# Altium PCB K.Ambrozinski_PCB1.PcbDoc
Units mm, origin at the board's own origin, x right, y up, seen from the top; angles counter-clockwise.
Board outline 59.05 x 33.83 mm, 2 copper layers (Top Layer, Bottom Layer), stack 1.569 mm thick; 66 components, 50 nets, 247 pads, 70 vias.
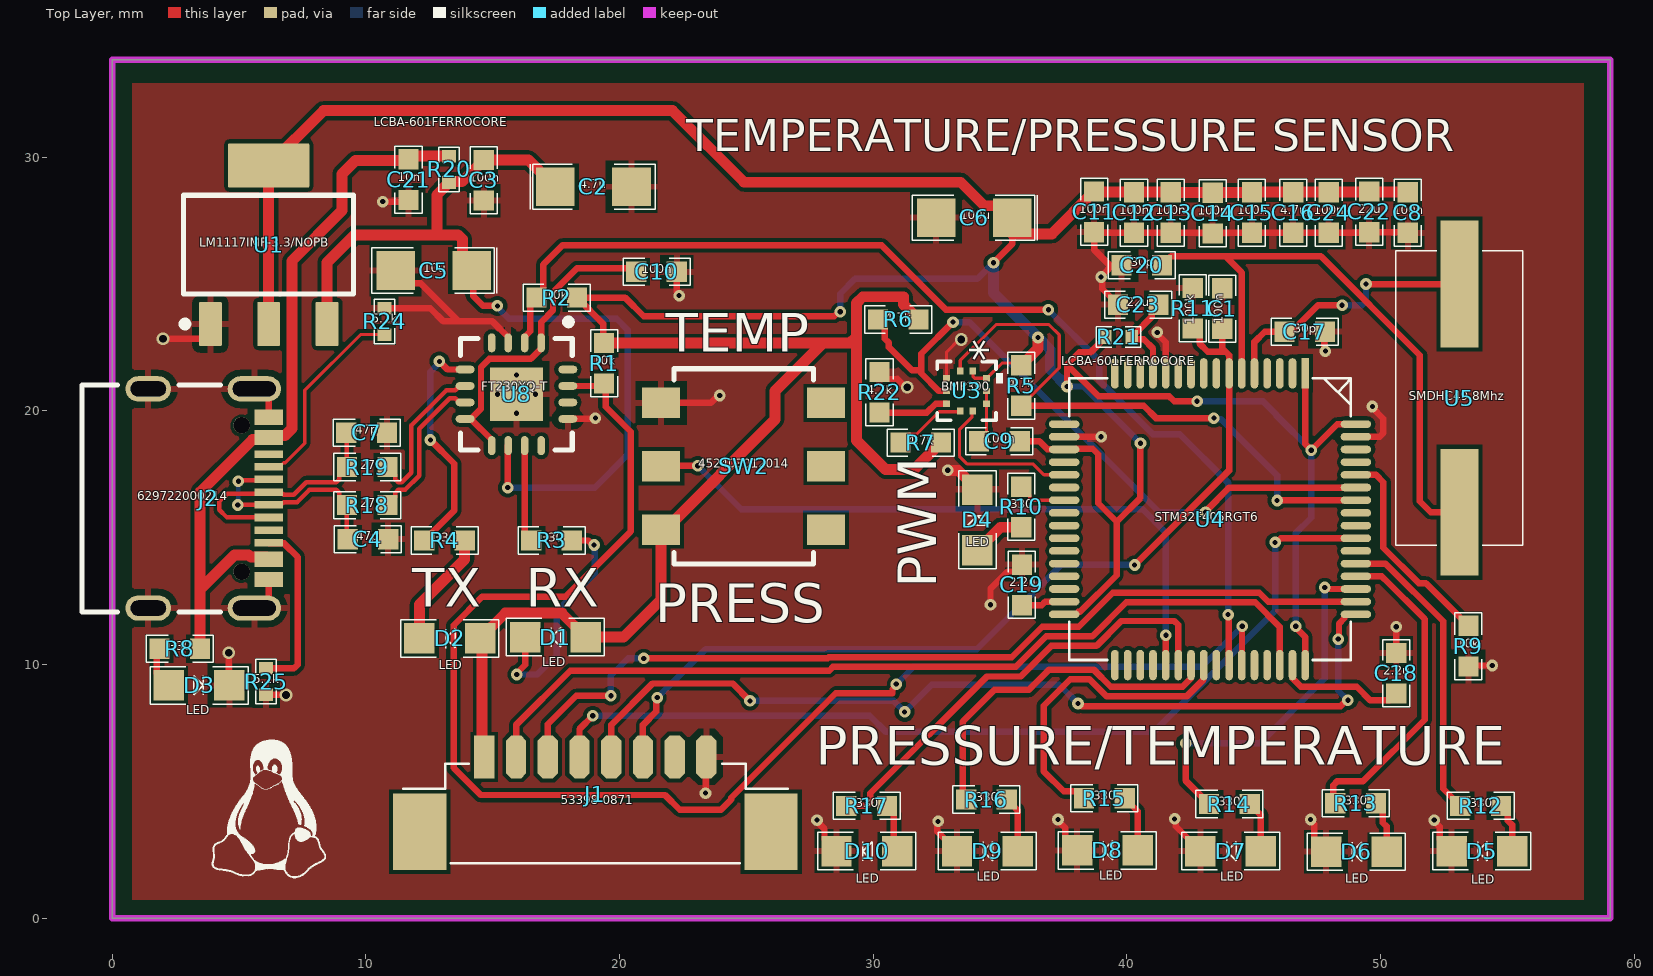
[diagram p0: Top Layer view]
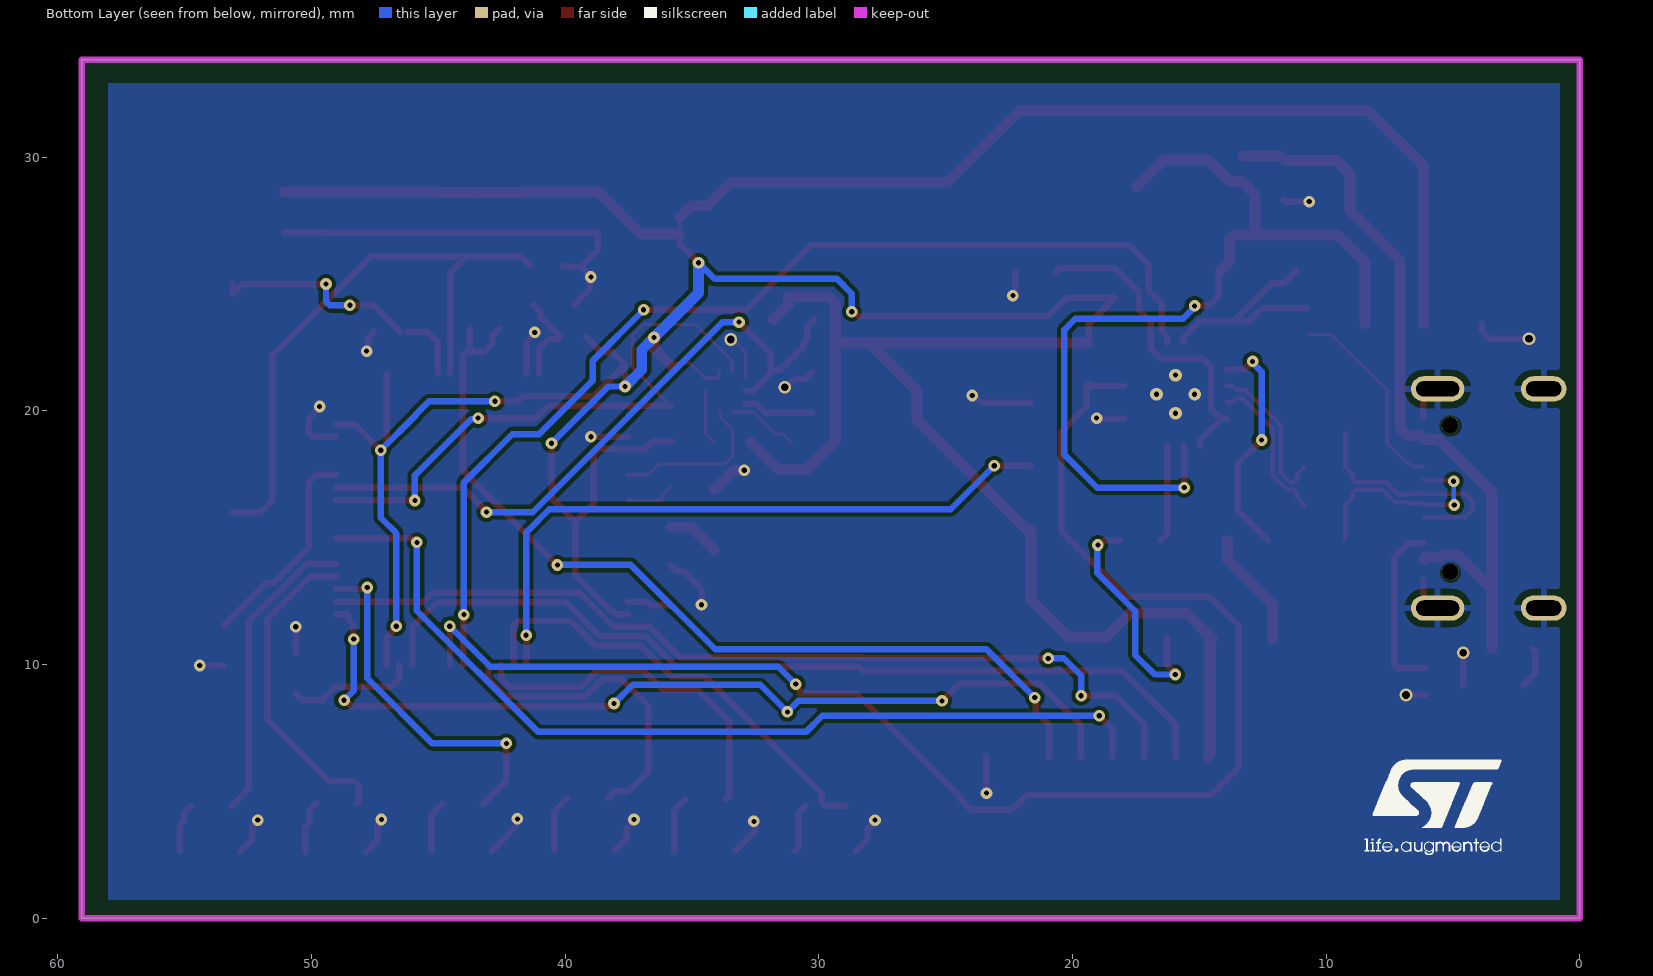
[diagram p1: Bottom Layer view, seen from below]

## Layer stack, top to bottom
Top Solder: solder mask 0.0254, SM-001, Dk 4
Top Layer: signal copper 0.035
Dielectric 1: core 1.4986, Core-043, Dk 4.3
Bottom Layer: signal copper 0.035
Bottom Solder: solder mask 0.0254, SM-001, Dk 4

## Board outline
0,0 0,33.833 59.055,33.833 59.055,0

## Design rules (kind name [scope] priority, off if disabled: settings)
Clearance [All vs InPoly] p1: gap=0.152 ignorepadtopadclearanceinfootprint=FALSE except(0: Arc-Hole Track-Hole SMDPad-Hole THPad-Hole Via-Hole Fill-Hole Poly-Hole Region-Hole Text-Hole)
Clearance Clearance_1 [All] p2: gap=0.127 ignorepadtopadclearanceinfootprint=FALSE except(0: Arc-Hole Track-Hole SMDPad-Hole THPad-Hole Via-Hole Fill-Hole Poly-Hole Region-Hole Text-Hole)
DiffPairsRouting [All] p1: maxlimit=0.254 minlimit=0.127 mostfreqgap=0.127 toplayer_minwidth=0.102 toplayer_maxwidth=0.381 toplayer_prefwidth=0.127 bottomlayer_minwidth=0.102 bottomlayer_maxwidth=0.381 bottomlayer_prefwidth=0.127 maxuncoupledlength=12.7
MinimumSolderMaskSliver SilkscreenOverComponentPads [All] p2: minsoldermaskwidth=0.254
PolygonConnect PolygonConnect_1 [isvia] p1: connectstyle=Direct reliefconductorwidth=0.254 reliefentries=4 polygonreliefangle="90 Angle" airgapwidth=0.254
PolygonConnect [All] p2: connectstyle=Relief reliefconductorwidth=0.254 reliefentries=4 polygonreliefangle="90 Angle" airgapwidth=0.254
RoutingVias [All] p1: holewidth=0.203 width=0.457 viastyle="Through Hole" minholewidth=0.203 minwidth=0.457 maxholewidth=5.08 maxwidth=12.7
SolderMaskExpansion [All] p1: expansion=0.102 istentingtop=FALSE
SupplyNets "Schematic Supply Nets_4" [InNet('GND')] p1: voltage=0.000
SupplyNets "Schematic Supply Nets_3" [InNet('VCCIO')] p2: voltage=0.000
SupplyNets "Schematic Supply Nets_2" [InNet('3V3')] p3: voltage=0.000
SupplyNets "Schematic Supply Nets_1" [InNet('5V')] p4: voltage=0.000
SupplyNets "Schematic Supply Nets" [InNet('3V3A')] p5: voltage=0.000
Width [All] p1: maxlimit=2.54 minlimit=0.102 preferedwidth=0.127 minimp=50.000000 maximp=50.000000 favimp=50.000000
29 further rules are at their usual default settings.

## Classes and differential pairs
differential pair class 90ohm: USB
component class part_2: C1 C11 C12 C13 C14 C15 C16 C17 C18 C19 C20 C24 D4 D5 D6 D7 D8 D9 D10 J1 R9 R10 R11 R12 R13 R14 R15 R16 R17 SW2 U4 U5
component class part_1: C2 C3 C4 C5 C6 C7 C8 C9 C10 C21 C22 C23 D1 D2 D3 J2 R1 R2 R3 R4 R5 R6 R7 R8 R18 R19 R20 R21 R22 R24 R25 U1 U3 U8
differential pair AA: +AA_P -AA_N
differential pair USB: +USB_P -USB_N

## Components (designator, comment, footprint, x,y, rotation, side; value= is the part's Value field where it differs from the comment)
C1 "100n" 0603 43.764,24.028 r270 top
C2 "4.7u" TANT_A 18.974,28.829 r0 top
C3 "100n" 0603 14.656,29.083 r90 top
C4 "47p" 0603 10.084,14.935 r180 top
C5 "10u" TANT_A 12.675,25.527 r180 top
C6 "100u" TANT_A 33.985,27.61 r180 top
C7 "47p" 0603 10.033,19.126 r180 top
C8 "100n" 0603 51.079,27.813 r90 top
C9 "100n" 0603 34.976,18.796 r0 top
C10 "100n" 0603 21.463,25.476 r180 top
C11 "100n" 0603 38.71,27.838 r90 top
C12 "100n" 0603 40.284,27.813 r90 top
C13 "100n" 0603 41.732,27.813 r90 top
C14 "100n" 0603 43.383,27.788 r90 top
C15 "100n" 0603 44.933,27.813 r90 top
C16 "4.7u" 0603 46.558,27.813 r90 top
C17 "30p" 0603 47.015,23.114 r0 top
C18 "2.2u" 0603 50.622,9.652 r270 top
C19 "2.2u" 0603 35.865,13.132 r270 top
C20 "30p" 0603 40.589,25.73 r180 top
C21 "10n" 0603 11.684,29.108 r90 top
C22 "22u" 0603 49.555,27.838 r90 top
C23 "22u" 0603 40.449,24.181 r0 top
C24 "100n" 0603 47.955,27.813 r90 top
D1 "LED" Dioda_0805 17.475,11.074 r0 top
D2 "LED" Dioda_0805 13.31,11.024 r0 top
D3 "LED" Dioda_0805 3.429,9.169 r180 top
D4 "LED" Dioda_0805 34.112,15.697 r270 top
D5 "LED" Dioda_0805 54,2.642 r0 top
D6 "LED" Dioda_0805 49.047,2.616 r0 top
D7 "LED" Dioda_0805 44.094,2.642 r0 top
D8 "LED" Dioda_0805 39.235,2.667 r0 top
D9 "LED" Dioda_0805 34.5,2.638 r0 top
D10 "LED" Dioda_0805 29.75,2.638 r0 top
J1 "53398-0871" 53398-0871 19.05,4.877 r0 top
J2 "629722000214" 629722000214 2.57,16.541 r270 top
R1 "10k" 0603 19.392,21.869 r90 top
R2 "10k" 0603 17.526,24.46 r0 top
R3 "330" 0603 17.323,14.884 r0 top
R4 "330" 0603 13.106,14.884 r0 top
R5 "4.7k" 0603 35.839,20.993 r90 top
R6 "4.7k" 0603 30.988,23.597 r0 top
R7 "4.7k" 0603 31.877,18.745 r0 top
R8 "330" 0603 2.667,10.617 r180 top
R9 "10k" 0603 53.467,10.719 r90 top
R10 "330" 0603 35.839,16.205 r270 top
R11 "100k" 0603 42.596,24.041 r270 top
R12 "330" 0603 53.95,4.42 r180 top
R13 "330" 0603 49.022,4.521 r180 top
R14 "330" 0603 44.044,4.496 r180 top
R15 "330" 0603 39.116,4.724 r180 top
R16 "330" 0603 34.468,4.674 r180 top
R17 "330" 0603 29.743,4.42 r180 top
R18 "27" 0603 10.058,16.281 r180 top
R19 "27" 0603 10.058,17.78 r180 top
R20 "LCBA-601FERROCORE" 0402 13.284,29.515 r270 top
R21 "LCBA-601FERROCORE" 0402 39.675,22.911 r0 top
R22 "4.7k" 0603 30.251,20.726 r270 top
R24 "5.1k" 0402 10.744,23.52 r90 top
R25 "5.1k" 0402 6.071,9.322 r270 top
SW2 "452403012014" 452403012014 24.892,17.805 r90 top
U1 "LM1117IMP-3.3/NOPB" DCY0004A_N 6.172,26.543 r90 top
U3 "BMP390" 10LGA_2X2X0p75_BOS 33.68,20.777 r270 top
U4 "STM32F405RGT6" "LQFP 64 0.5" 43.282,15.723 r180 top
U5 "SMDHC49 8Mhz" SMDHC_49 53.111,20.498 r90 top
U8 "FT230XQ-T" QFN-16_N 15.938,20.65 r270 top

## Footprints (in the part's own frame and the unit in brackets; to place one, negate y for a bottom-side part, rotate by r counter-clockwise, add the part's x,y. Pads: shape width x height; smd on the part's side, far side on the other; paste and mask are expansions set on the pad)
10LGA_2X2X0p75_BOS [mil]
  rect 11x10 smd paste+0 mask+0: 1(-31,9.84) 2(-31,-9.84) 6(31,-9.84) 7(31,9.84)
  rect 10x11 smd paste+0 mask+0: 3(-19.68,-31) 4(0,-31) 5(19.68,-31) 8(19.68,31) 9(0,31) 10(-19.68,31)
  silkscreen extent -46,-46 46,56, body extent -41,-41 41,41, height 32
0402 [mm]
  rect 0.5x0.55 smd: 1(-0.521,0) 2(0.521,0)
  silkscreen extent -0.88,-0.41 0.88,0.41, body extent -0.67,-0.28 0.63,0.28, height 0.5
0603 [mm]
  rect 0.8x0.8 smd: 1(-0.8,0) 2(0.8,0)
  silkscreen extent -1.32,-0.53 1.32,0.53, body extent -1.09,-0.4 1.14,0.4, height 0.6
53398-0871 [mm] "Molex PicoBlade 8pin pionowy SMD"
  rect 2.1x3 smd: 0(-6.925,-1.475) 0(6.925,-1.475)
  rect 0.8x1.7 smd: 1(-4.375,1.475)
  oct 0.8x1.7 smd: 2(-3.125,1.475) 3(-1.875,1.475) 4(-0.625,1.475) 5(0.625,1.475) 6(1.875,1.475) 7(3.125,1.475) 8(4.375,1.475)
  silkscreen extent -7.57,-2.72 7.58,1.2, body extent -7.57,-2.57 7.57,1.62, height 4.7
452403012014 [mm] "SMT Mini Slide Switch, Same Side Connection"
  rect 1.2x1.5 smd: 1(-2.5,3.25) 2(0,3.25) 3(2.5,3.25) 4(-2.5,-3.25) 5(0,-3.25) 6(2.5,-3.25)
  silkscreen extent -3.85,-2.75 3.85,2.75, body extent -3.85,-3.75 3.85,3.75, height 3.48
629722000214 [mm] "USB TYPE C VERTICAL PLUG"
  rect 0.6x1.14 smd: A1/B12(-3.2,3.605) A4/B9(-2.4,3.605) A9/B4(2.4,3.605) A12/B1(3.2,3.605)
  rect 0.3x1.14 smd: A5(-1.25,3.605) A6(-0.25,3.605) A7(0.25,3.605) A8(1.25,3.605) B5(1.75,3.605) B6(0.75,3.605) B7(-0.75,3.605) B8(-1.75,3.605)
  round 0.65 hole 0.65 unplated: MH1(-2.89,2.535) MH2(2.89,2.535)
  oval 1x2.1 hole 0.6 slot 1.7 at 90 deg: Shell(-4.32,3.035) Shell(4.32,3.035)
  oval 1x1.8 hole 0.6 slot 1.4 at 90 deg: Shell(-4.32,-1.145) Shell(4.32,-1.145)
  silkscreen extent -4.47,-3.76 4.47,1.7, body extent -4.79,-3.76 4.79,3.95, height 3.33
DCY0004A_N [mm] "SOT223, 4-Leads, Body 6.7x3.7mm, Pitch 2.3mm, IPC Medium Density"
  rrect11% 1.75x0.9 smd: 1(-3.125,2.3) 2(-3.125,0) 3(-3.125,-2.3)
  rrect6% 1.75x3.2 smd: 4(3.125,0)
  silkscreen extent -3.25,-3.35 1.95,3.42, body extent -3.5,-3.25 3.5,3.25, height 1.62
Dioda_0805 [mm]
  rect 1.2x1.2 smd: 1(-1.194,0) 2(1.194,0)
  silkscreen extent -1.93,-0.74 1.93,0.74, body extent -1.44,-0.6 1.53,0.6, height 0.6
"LQFP 64 0.5" [mm] "Low-profile Quad Flat Package, 64 leads, 0.5 mm"
  rect 0.3x1.2 smd: 1(-3.75,-5.75)
  oval 0.3x1.2 smd: 2(-3.25,-5.75) 3(-2.75,-5.75) 4(-2.25,-5.75) 5(-1.75,-5.75) 6(-1.25,-5.75) 7(-0.75,-5.75) 8(-0.25,-5.75) 9(0.25,-5.75) 10(0.75,-5.75) 11(1.25,-5.75) 12(1.75,-5.75) 13(2.25,-5.75) 14(2.75,-5.75) 15(3.25,-5.75) 16(3.75,-5.75) 33(3.75,5.75) 34(3.25,5.75) 35(2.75,5.75) 36(2.25,5.75) 37(1.75,5.75) 38(1.25,5.75) 39(0.75,5.75) 40(0.25,5.75) 41(-0.25,5.75) 42(-0.75,5.75) 43(-1.25,5.75) 44(-1.75,5.75) 45(-2.25,5.75) 46(-2.75,5.75) 47(-3.25,5.75) 48(-3.75,5.75)
  oval 1.2x0.3 smd: 17(5.75,-3.75) 18(5.75,-3.25) 19(5.75,-2.75) 20(5.75,-2.25) 21(5.75,-1.75) 22(5.75,-1.25) 23(5.75,-0.75) 24(5.75,-0.25) 25(5.75,0.25) 26(5.75,0.75) 27(5.75,1.25) 28(5.75,1.75) 29(5.75,2.25) 30(5.75,2.75) 31(5.75,3.25) 32(5.75,3.75) 49(-5.75,3.75) 50(-5.75,3.25) 51(-5.75,2.75) 52(-5.75,2.25) 53(-5.75,1.75) 54(-5.75,1.25) 55(-5.75,0.75) 56(-5.75,0.25) 57(-5.75,-0.25) 58(-5.75,-0.75) 59(-5.75,-1.25) 60(-5.75,-1.75) 61(-5.75,-2.25) 62(-5.75,-2.75) 63(-5.75,-3.25) 64(-5.75,-3.75)
  silkscreen extent -5.55,-5.55 5.55,5.55, body extent -6,-6 6,6, height 1.5
QFN-16_N [mm] "QFN, 16-Leads, Body 4x4mm, Pitch 0.65mm, Thermal Pad 2.1x2.1mm, IPC Medium Density"
  oval 0.75x0.3 smd: 1(-2.025,0.975) 2(-2.025,0.325) 3(-2.025,-0.325) 4(-2.025,-0.975) 9(2.025,-0.975) 10(2.025,-0.325) 11(2.025,0.325) 12(2.025,0.975)
  oval 0.3x0.75 smd: 5(-0.975,-2.025) 6(-0.325,-2.025) 7(0.325,-2.025) 8(0.975,-2.025) 13(0.975,2.025) 14(0.325,2.025) 15(-0.325,2.025) 16(-0.975,2.025)
  rect 2.1x2.1 smd paste-1.05: 17(0,0)
  silkscreen extent -2.97,-2.2 2.2,2.2, body extent -2.05,-2.05 2.05,2.05, height 0.8
SMDHC_49 [mm]
  rect 5x1.5 smd: 1(-4.5,0) 2(4.5,0)
  silkscreen extent -5.8,-2.5 5.8,2.5, body extent -5.8,-2.5 5.8,2.5, height 4.3
TANT_A [mil]
  rect 60x60 smd: 1(-59.06,0) 2(59.06,0)
  silkscreen extent -98,-35 96,35, body extent -67,-33 67,33, height 67

## Part data
C1 C11 C12 C13 C14 C15 C16 C17 C18 C19 C20 C22 C23 C24: library part CapN, "kondensator ceramiczny"
  C1 C11 C12 C13 C14 C15 C16 C17 C18 C19 C20 C24: V="10 V"
  C22 C23: V=10V
C2 C5 C6: library part CapP, "kondensator tantalowy", VOLTAGE="10 V"
C3 C4 C7 C8 C9 C10 C21: library part CapN, "kondensator ceramiczny", VOLTAGE="10 V"
  C3 C4 C7 C8 C9 C10: V="10 V"
  C21: Parameter 1=10V
D1 D2 D3 D4 D5 D6 D7 D8 D9 D10: library part Dioda_LED, "Dioda LED SMD"
J1: library part CON8, "Molex PicoBlade 8pin", Producent=Molex
J2: "WR-COM USB 2.0 Type C Receptacle Horizontal SMT", Manufacturer="Wurth Elektronik", Operating Temperature Max=85°C, Operating Temperature Min=-40°C, Rated Current=5A, Working Voltage="20V (DC)", Application="USB 2.0", Category="Input/Output Connectors", ComponentLink1Description="Website Link", ComponentLink1URL=https://www.we-online.com/redexpert/article/629722000214?ad, ComponentLink2Description="Datasheet Link", ComponentLink2URL=https://www.we-online.com/redexpert/spec/629722000214?ad, Gender=Receptacle, Interface Type="Type C", Manufacturer Part Number=629722000214, Match Code=WR-USB, Mount="Surface Mount", Number of Pins=16, Number of Ports=1, Orientation=Horizontal, Packaging="Tape and Reel"
R1 R2 R3 R4 R5 R6 R7 R8 R9 R10 R11 R12 R13 R14 R15 R16 R17 R18 R19 R20 R21 R22 R24 R25: library part Res, "Rezystor SMD"
SW2: "WS-SLSV SMT Mini Slide Switch, Same Side Connection, DPDT, 6VDC, 300mA, 350g", Manufacturer="Wurth Elektronik", Operating Temperature Max=85°C, Operating Temperature Min=-40°C, Rated Current=300mA, Rated voltage=6VDC, Category="Slide Switches", Circuit=DPDT, ComponentLink1Description="Website Link", ComponentLink1URL=https://www.we-online.com/redexpert/article/452403012014?ad, ComponentLink2Description="Datasheet Link", ComponentLink2URL=https://www.we-online.com/redexpert/spec/452403012014?ad, Contact Material="Copper Alloy", Contact Plating=Silver, Height=3.3mm, Length=7.7mm, Manufacturer Part Number=452403012014, Match Code=WS-SLSV, Mount="Surface Mount", Operation Force=350g, Packaging="Tape and Reel", Terminal Material="Copper Alloy", Terminal Plating=Silver, Width=5.5mm
U1: library part CMP-0062-01631-4, "800mA Low-Dropout Linear Regulator, 4-pin SOT-223, Pb-Free", Manufacturer="Texas Instruments", PackageTopMarking=XYTT*N05B, PowerWise=N, Code_IPC=SOT223-4, Code_JEDEC=TO-261-AA, ComponentLink1Description="Datasheet URL", ComponentLink1URL=http://www.ti.com/general/docs/lit/getliterature.tsp?genericPartNumber=LM1117-N&fileType=pdf, CompType="LDO IC", High-Reliability=Y, PackageDescription="Molded SOT-223, 6.50 x 3.56 x 1.6mm Body, 4 Lead, 2.3mm Pitch", PackageReference=DCY0004A, PartNumber=LM1117IMP-3.3/NOPB, PinCount=4, RoHS=Y
U3: "No Description Available", Mfr_Name="Bosch Sensortec", RefDes=RefDes, Type=Type
U4: library part STM32F415RGT6, "STM32F415, 64 leads, LQFP"
U5: library part kwarc, "rezonator kwarcowy"
U8: "USB to Basic UART Interface Chip, UHCI/OHCI/EHCI Compatible, USB 2.0 Compatible, -40 to +85 degC, 16-Pin QFN, Pb-Free, Tray", Manufacturer=FTDI, Code_JEDEC=MO-220WGGC, ComponentLink1Description="Manufacturer URL", ComponentLink1URL=http://www.ftdichip.com/, ComponentLink2Description=Datasheet, ComponentLink2URL=http://www.ftdichip.com/Support/Documents/DataSheets/ICs/DS_FT230X.pdf, ComponentLink3Description="FT230X Product Page", ComponentLink3URL=www.ftdichip.com/Products/ICs/FT230X.html, DatasheetVersion="ver 1.2, Feb-2013", PackageDescription="16-Pin Quad Flat No-Lead, 4x4 mm Body, 0.65 mm Pitch", PackageReference=QFN-16, PackageVersion=Feb-13, PartNumber=FT230XQ-T

## Via types
v1: diameter 0.457, hole 0.203, Top Layer to Bottom Layer, 61 vias
v2: diameter 0.5, hole 0.3, Top Layer to Bottom Layer, 5 vias
v3: diameter 0.5, hole 0.2, Top Layer to Bottom Layer, 4 vias

## Nets (pads, with @x,y where several pads share a name; then routed paths per layer and width w, separated by ;. In a path a pad name is that pad's centre, name@x,y a point inside that pad or via, vN(x,y) a via of type N, cw(c..) or ccw(c..) an arc to the next point about the centre after c; other vN are vias at no path point)
3V3: C6.1 C8.2 C9.2 C11.2 C12.2 C13.2 C14.2 C15.2 C16.2 C22.2 C24.2 D1.2 D2.2 J1.1 R1.2 R2.2 R5.2 R6.2 R7.2 R21.1 SW2.1 U1.2 U1.4 U3.1 U3.10 U4.1 U4.19 U4.32 U4.48 U4.64 | length 182.2
  Top Layer w0.127: U3.1 33.934,21.561 33.934,21.357 34.009,21.283 34.475,21.283 34.48,21.277 35.079,21.876 35.757,21.876 R5.2 ; C6.1@35.485,26.975 C6.1
  Top Layer w0.254: R1.2 19.355,22.707 19.355,23.431 R2.2 20.218,24.46 20.955,23.724 28.469,23.724 28.647,23.901 v1(28.702,23.901) ; v1(34.746,25.832) 35.485,26.571 C6.1@35.485,26.975 ; C9.2 36.557,18.796 36.871,18.481 37.523,18.481 U4.19 37.994,18.473 38.017,18.496 38.662,18.496 38.874,18.284 38.874,16.346 39.599,15.622 ; U4.32 37.994,11.973 38.09,12.069 38.149,12.069 39.599,13.518 39.599,15.622 ; v1(37.643,20.955) 37.643,21.547 37.655,21.56 37.655,21.831 38.121,22.297 38.565,22.297 39.154,22.886 R21.1 ; 37.655,21.806 38.887,20.574 41.667,20.574 41.87,20.371 v1(42.774,20.371) ; v1(40.538,18.72) 40.538,16.561 39.599,15.622 ; v1(46.66,11.506) 46.66,11.451 47.032,11.079 U4.48 ; U4.1 47.032,18.691 47.269,18.453 v1(47.269,18.44) 48.293,19.464 49.023,19.464 U4.64
  Top Layer w0.432: U1.2 U1.4 8.33,31.826 22.098,31.826 24.917,29.007 33.452,29.007 34.379,28.08 35.015,28.08 C6.1 ; J1.1 14.589,6.438 14.589,10.938 D2.2 15.497,12.017 17.726,12.017 D1.2 20.168,11.074 21.642,12.549 SW2.1 21.792,15.305 26.137,19.65 26.137,20.777 28.024,22.664 ; R1.2 19.397,22.664 28.024,22.664 ; 29.337,22.932 29.337,18.821 30.48,17.678 31.61,17.678 R7.2 ; R6.2 31.197,24.187 31.197,24.492 29.59,24.492 29.337,24.239 29.337,22.917 29.084,22.664 28.024,22.664 ; C6.1@35.485,26.975 37.046,26.975 C11.2 ; R5.2 36.495,22.449 36.495,22.881 v1(36.5,22.885) ; C11.2@38.71,28.613 C12.2 C13.2 41.745,28.6 43.37,28.6 C14.2 43.396,28.6 44.92,28.6 C15.2 C16.2 C24.2 47.968,28.626 49.543,28.626 C22.2 49.568,28.626 51.067,28.626 C8.2
  Bottom Layer w0.254: v1(28.702,23.901) 28.702,24.613 29.286,25.197 34.111,25.197 34.226,25.312 v1(34.746,25.832) ; v1(37.643,20.955) 38.303,20.955 v1(40.538,18.72) ; v1(42.774,20.371) 45.368,20.371 45.898,19.841 45.898,19.812 v1(47.269,18.44) 47.269,15.786 46.66,15.176 v1(46.66,11.506)
  Bottom Layer w0.432: v1(34.746,25.832) 34.746,24.639 v1(36.5,22.885) 36.982,22.403 36.982,21.615 v1@37.638,20.96
3V3A: C23.2 R21.2 U4.13 | length 3.7
  Top Layer w0.254: U4.13 41.032,22.454 40.663,22.822 40.284,22.822 R21.2 40.195,22.936 40.318,23.059 40.344,23.059 40.976,23.692 40.976,23.908 C23.2
5V: C2.1 C3.2 C5.1 R20.2 U1.3 U8.10 | length 36.5
  Top Layer w0.254: C5.1 14.228,25.474 14.228,24.533 14.63,24.13 v1(15.189,24.13) ; v1(15.596,16.967) 15.604,16.976 15.604,18.616 U8.10
  Top Layer w0.432: U1.3 8.472,25.846 9.552,26.925 12.802,26.925 ; C5.1 13.805,25.896 13.805,26.759 13.638,26.925 12.802,26.925 ; C2.1 16.42,29.883 C3.2 13.801,29.028 13.318,29.028 R20.2 13.259,28.994 13.225,28.96 13.225,28.935 12.802,28.511 12.802,26.925
  Bottom Layer w0.254: v1(15.189,24.13) 15.189,24.079 15.646,23.622 19.888,23.622 20.32,23.19 20.32,18.263 19.025,16.967 v1(15.596,16.967)
AA_N: R18.1 U8.7 | length 6.1
  Top Layer w0.178: R18.1 11.17,16.593 11.17,16.774 11.274,16.878 11.547,16.878 12.103,17.434 12.103,19.294 13.307,20.498 13.523,20.498 13.695,20.325 U8.7
AA_P: R19.1 U8.6 | length 6.1
  Top Layer w0.178: R19.1 11.17,17.469 11.17,17.287 11.274,17.183 11.421,17.183 11.798,17.56 11.798,19.42 13.181,20.803 13.523,20.803 13.695,20.975 U8.6
GND: C1.1 C2.2 C3.1 C4.1 C5.2 C6.2 C7.1 C8.1 C10.1 C11.1 C12.1 C13.1 C14.1 C15.1 C16.1 C17.2 C18.1 C19.1 C20.2 C21.1 C22.1 C23.1 C24.1 D3.1 D4.1 D5.1 D6.1 D7.1 D8.1 D9.1 D10.1 J1.8 J2.A1/B12 J2.A12/B1 J2.Shell R9.1 R11.1 R22.1 R24.2 R25.2 SW2.3 U1.1 U3.3 U4.12 U4.18 U4.63 U8.3 U8.13 U8.17 | length 64.6
  Top Layer w0.127: U3.3 32.893,22.301 33.401,22.809 v2(33.477,22.809)
  Top Layer w0.254: v2(2.007,22.835) 3.549,22.835 3.872,23.158 U1.1 ; v2(4.597,10.465) 4.597,9.195 D3.1 ; J2.Shell@5.605,12.221 5.831,12.221 6.175,12.566 J2.A12/B1 ; J2.Shell@5.605,20.861 5.831,20.861 6.175,20.516 J2.A1/B12 ; R25.2 6.077,8.795 6.852,8.795 v2@6.858,8.788 ; v1(10.668,28.245) 11.62,28.245 C21.1 ; R24.2 12.546,24.041 13.066,23.52 13.665,23.52 ; C5.2 11.685,25.017 12.169,25.017 13.665,23.52 ; U8.3 15.613,22.9 14.993,23.52 13.665,23.52 ; U8.13 17.972,19.684 19.024,19.684 v1(19.05,19.71) ; SW2.3 23.603,20.305 23.897,20.599 v1(23.952,20.599) ; C10.1 22.263,24.68 22.352,24.591 v1(22.352,24.536) ; v1(23.393,4.928) 23.409,4.943 23.409,6.336 J1.8 ; v1(27.788,3.861) 27.788,3.806 28.083,3.51 28.083,3.111 D10.1 ; R22.1 30.524,21.253 30.953,21.253 31.277,20.93 v2(31.344,20.93) ; v1(32.563,3.81) 32.563,3.755 32.52,3.712 32.52,3.424 D9.1 ; v1(34.626,12.352) 34.626,12.985 35.303,13.662 35.595,13.662 C19.1 ; v1(37.287,3.886) 37.287,3.831 37.568,3.55 37.568,3.14 D8.1 ; U4.18 v1(38.989,18.974) ; C23.1 39.028,24.802 39.028,25.234 v1(38.989,25.273) 38.989,25.298 39.376,25.686 ; C20.2@40.069,25.705 40.069,25.73 40.024,25.686 39.376,25.686 ; v1(41.199,23.089) 41.199,23.034 41.532,22.701 U4.12 ; v1(41.885,3.912) 41.923,3.873 41.923,3.619 D7.1 ; v1(47.244,3.886) 47.244,3.831 47.381,3.695 47.381,3.089 D6.1 ; C17.2@47.536,23.114 47.789,22.861 47.789,22.391 v1(47.828,22.352) ; U4.63 49.965,18.973 50.114,19.121 50.114,19.681 49.682,20.113 v1(49.682,20.168) ; C18.1 v1(50.622,11.481) ; C8.1 51.054,27.038 C22.1 49.53,27.013 C24.1 C16.1 C15.1 43.409,27.013 C14.1 43.358,27.013 C13.1 C12.1 38.735,27.013 C11.1 38.71,26.352 39.376,25.686 ; v1(52.121,3.861) 52.121,3.806 52.334,3.593 52.334,3.115 D5.1 ; R9.1 53.505,9.957 v1(54.407,9.957)
  Top Layer w0.432: v1(32.944,17.653) 32.949,17.648 33.355,17.648 D4.1
  other v2: 6.855,8.792
  other v3: 15.938,19.9 15.188,20.65 16.688,20.65 15.938,21.4
INT: U3.7 U4.21 | length 6.4
  Top Layer w0.127: U3.7 33.893,19.952 33.893,19.745 33.401,19.253 33.401,18.212 33.718,17.895 36.309,17.895 36.731,17.473 U4.21
MEAS1: R12.2 U4.53 | length 11.9
  Top Layer w0.254: U4.53 50.199,13.973 52.476,11.695 52.476,5.093 R12.2
MEAS2: R13.2 U4.52 | length 12.8
  Top Layer w0.254: R13.2 48.136,4.607 48.136,5.236 48.285,5.385 49.301,5.385 51.74,7.823 51.74,11.786 50.149,13.377 50.14,13.377 50.044,13.473 U4.52
MEAS3: R14.2 U4.51 | length 14.2
  Top Layer w0.254: v1(42.316,6.883) 42.316,5.423 R14.2 ; v1(47.803,13.03) 47.858,13.03 47.915,12.973 U4.51
  Bottom Layer w0.254: v1(42.316,6.883) 45.237,6.883 47.803,9.449 v1(47.803,13.03)
MEAS4: R15.2 U4.40 | length 12.5
  Top Layer w0.254: R15.2 38.043,4.997 37.509,4.997 36.729,5.778 36.729,8.371 37.772,9.414 38.53,9.414 39.206,8.738 42.357,8.738 43.023,9.404 43.023,9.964 U4.40
MEAS5: R16.2 U4.39 | length 13.9
  Top Layer w0.254: R16.2 33.528,4.813 33.528,7.747 34.773,8.992 36.138,8.992 36.941,9.795 38.688,9.795 39.364,9.119 42.199,9.119 42.523,9.442 42.523,9.964 U4.39
MEAS6: R17.2 U4.38 | length 18
  Top Layer w0.254: R17.2 29.741,4.42 29.889,4.568 29.889,4.925 34.487,9.522 35.82,9.522 37.024,10.726 38.802,10.726 39.786,11.711 41.874,11.711 42.023,11.562 42.023,9.981 U4.38
MEASUREMENT_MODE: SW2.2 U4.37 | length 26.2
  Top Layer w0.254: SW2.2 21.667,17.831 v1(23.089,17.831) ; U4.37 41.536,9.977 41.536,11.146 v1(41.54,11.151)
  Bottom Layer w0.254: v1(23.089,17.831) 24.801,16.118 40.624,16.118 41.54,15.201 v1(41.54,11.151)
NetC9_1: C9.1 U3.8 U3.9 | length 2.1
  Top Layer w0.127: C9.1 34.468,19.088 U3.8 U3.9
NetD1_1: D1.1 R3.2 | length 9.4
  Top Layer w0.254: v1(15.951,9.601) 15.951,9.656 16.281,9.986 D1.1 ; R3.2 18.766,14.884 18.944,14.707 v1(18.999,14.707)
  Bottom Layer w0.254: v1(15.951,9.601) 16.764,9.601 17.526,10.363 17.526,12.09 19.025,13.589 19.025,14.681 v1(18.999,14.707)
NetD2_1: D2.1 R4.2 | length 4.6
  Top Layer w0.432: D2.1 12.116,12.357 13.896,14.137 13.896,14.874 R4.2
NetD3_2: D3.2 R8.2 | length 1.7
  Top Layer w0.254: R8.2 1.762,10.512 1.762,9.642 D3.2
NetD4_2: D4.2 R10.2 | length 2.3
  Top Layer w0.127: R10.2@35.73,15.295 R10.2
  Top Layer w0.432: D4.2 35.014,15.405 R10.2
NetD5_2: D5.2 R12.1 | length 2
  Top Layer w0.254: R12.1 55.023,4.147 55.023,3.842 55.194,3.67 D5.2
NetD6_2: D6.2 R13.1 | length 2.1
  Top Layer w0.254: R13.1 50.095,4.248 50.095,3.759 50.241,3.613 D6.2
NetD7_2: D7.2 R14.1 | length 2
  Top Layer w0.254: R14.1 45.288,4.051 D7.2
NetD8_2: D8.2 R15.1 | length 2.3
  Top Layer w0.254: R15.1 40.429,4.211 D8.2
NetD9_2: D9.2 R16.1 | length 2.2
  Top Layer w0.254: R16.1 35.693,4.248 D9.2
NetD10_2: D10.2 R17.1 | length 1.9
  Top Layer w0.254: R17.1 30.816,4.147 30.816,2.765 D10.2
NetJ2_A5: J2.A5 R24.1 | length 7.9
  Top Layer w0.127: J2.A5 6.595,17.791 6.755,17.951 6.824,17.951 7.595,18.721 7.595,20.803 9.792,23 R24.1@10.719,23
NetJ2_B5: J2.B5 R25.1 | length 6.9
  Top Layer w0.254: R25.1@6.096,9.842 7.166,9.842 7.315,9.991 7.315,14.23 6.778,14.768 6.198,14.768 J2.B5
NetR7_1: R7.1 U3.6 | length 2.9
  Top Layer w0.127: R7.1 31.414,19.082 31.718,19.082 32.596,19.96 33.4,19.96 U3.6
NetR9_2: R9.2 U4.60 | length 8.4
  Top Layer w0.254: U4.60 49.822,17.473 50.114,17.181 50.114,14.596 51.516,13.194 51.792,13.194 R9.2
NetR22_2: R22.2 U3.5 | length 2.8
  Top Layer w0.254: R22.2 32.114,19.926 32.465,20.277 U3.5
OSC_IN: C17.1 U4.5 U5.2 | length 10.9
  Top Layer w0.254: U4.5 45.032,22.711 45.434,23.114 C17.1 ; C17.1@46.495,23.114 47.536,24.155 v1(48.489,24.155) ; v1(49.428,24.994) 52.726,24.994 53.111,24.608 U5.2
  Bottom Layer w0.254: v1(48.489,24.155) 49.28,24.155 49.428,24.304 v1(49.428,24.994)
OSC_OUT: C20.1 U4.6 U5.1 | length 24.3
  Top Layer w0.127: U4.6@44.528,21.476 U4.6
  Top Layer w0.254: C20.1 41.745,26.086 43.891,26.086 ; U4.6 44.532,25.445 43.891,26.086 ; U5.1 51.98,15.998 51.552,16.426 51.552,22.187 47.654,26.086 43.891,26.086
PWM: R10.1 U4.23 | length 2
  Top Layer w0.127: R10.1 36.176,16.669 36.176,16.529 36.232,16.473 U4.23
RXD: R2.1 U4.42 U8.2 | length 42.6
  Top Layer w0.254: U8.2 16.263,22.913 16.485,23.134 R2.1@16.485,24.219 ; R2.1 R2.1@16.485,24.219 ; v1(36.906,23.978) 32.871,23.978 30.331,26.518 17.755,26.518 16.999,25.762 16.999,24.733 R2.1@16.485,24.219 ; v1(43.993,11.963) 44.023,11.933 44.023,9.981 U4.42
  Bottom Layer w0.254: v1(36.906,23.978) 38.907,21.977 38.907,21.198 41.029,19.075 42.088,19.075 43.993,17.17 v1(43.993,11.963)
RXLED: R3.1 U8.11 | length 3.8
  Top Layer w0.254: U8.11 16.263,15.144 R3.1
SCL: R5.1 U3.2 U4.58 | length 23.8
  Top Layer w0.127: U3.2 33.43,21.958 33.43,21.981 34.843,23.393 36.932,23.393 37.338,22.987 37.338,21.692 R5.1
  Top Layer w0.254: R5.1 40.665,20.193 41.148,19.71 v1(43.434,19.71) ; v1(45.923,16.459) 45.93,16.466 49.025,16.466 U4.58
  Bottom Layer w0.254: v1(43.434,19.71) 43.473,19.672 43.704,19.672 45.923,17.452 v1(45.923,16.459)
SDA: R6.1 U3.4 U4.59 | length 26.2
  Top Layer w0.254: R6.1 30.461,23.324 30.461,22.841 30.613,22.689 30.613,22.509 31.533,21.59 31.892,21.59 ; U3.4 32.591,20.777 31.892,21.476 31.892,21.59 ; v1(33.147,23.495) 31.892,22.24 31.892,21.59 ; v1(43.104,16.002) 43.104,16.031 44.043,16.97 49.029,16.97 U4.59
  Bottom Layer w0.254: v1(33.147,23.495) 33.785,23.495 41.278,16.002 v1(43.104,16.002)
STM32_D_JCLK: J1.5 U4.49 | length 36.4
  Top Layer w0.254: J1.5 19.675,7.615 21.306,9.246 24.46,9.246 v1(25.146,8.56) ; v1(38.075,8.458) 38.13,8.458 38.231,8.357 48.434,8.357 48.662,8.585 v1(48.717,8.585) ; v1(48.336,10.998) 48.365,11.027 48.365,11.608 48.573,11.816 48.573,11.951 48.594,11.973 U4.49
  Bottom Layer w0.254: v1(25.146,8.56) 30.81,8.56 v1(31.242,8.128) 32.309,9.195 37.338,9.195 v1(38.075,8.458) ; v1(48.336,10.998) 48.336,8.966 v1(48.717,8.585)
STM32_D_JTDI: J1.3 U4.50 | length 35.9
  Top Layer w0.254: J1.3 17.175,7.645 18.293,8.763 v1(19.66,8.763) ; v1(20.955,10.236) 28.21,10.236 28.258,10.284 35.459,10.284 36.663,11.488 38.107,11.488 39.446,12.827 45.217,12.827 45.572,12.473 U4.50
  Bottom Layer w0.254: v1(19.66,8.763) 19.66,9.55 20.345,10.236 v1(20.955,10.236)
STM32_D_JTDO: J1.4 U4.55 | length 36.9
  Top Layer w0.254: J1.4 18.425,7.452 v1(18.948,7.976) ; v1(45.847,14.808) 45.902,14.808 46.066,14.973 U4.55
  Bottom Layer w0.254: v1(18.948,7.976) 29.867,7.976 30.506,7.336 41.064,7.336 45.847,12.119 v1(45.847,14.808)
STM32_D_JTMS: J1.2 U4.46 | length 35.3
  Top Layer w0.254: J1.2 15.925,7.615 18.064,9.754 28.267,9.754 28.416,9.903 35.617,9.903 36.821,11.107 38.644,11.107 39.983,12.446 45.06,12.446 46.023,11.483 46.023,9.981 U4.46
STM32_D_RST: C1.2 J1.6 R11.2 U4.7 | length 36.4
  Top Layer w0.254: J1.6 20.925,7.615 21.451,8.141 21.451,8.65 v1(21.49,8.688) ; v1(40.31,13.919) 44.032,17.641 U4.7 44.04,21.481 44.04,21.964 44.044,21.967 44.044,22.178 43.895,22.327 ; R11.2 42.869,22.968 42.869,22.651 43.193,22.327 43.895,22.327 ; C1.2 43.764,22.457 43.895,22.327
  Bottom Layer w0.254: v1(21.49,8.688) 23.393,10.592 34.087,10.592 37.414,13.919 v1(40.31,13.919)
TXD: R1.1 U4.43 U8.15 | length 58.4
  Top Layer w0.254: U8.15 19.298,20.975 R1.1 19.456,21.005 19.456,20.16 20.447,19.169 20.447,15.24 17.882,12.675 14.595,12.675 13.462,11.541 13.462,5.918 14.529,4.851 21.793,4.851 22.377,4.267 24.003,4.267 24.411,4.676 24.411,4.747 28.529,8.865 30.763,8.865 30.763,9.016 30.912,9.165 v1(30.912,9.22) ; U4.43 44.54,9.981 44.54,11.495 v1(44.552,11.506)
  Bottom Layer w0.254: v1(30.912,9.22) 31.598,9.906 42.951,9.906 v1(44.552,11.506) v1@44.539,11.519
TXLED: R4.1 U8.5 | length 9.2
  Top Layer w0.254: R4.1 13.487,16.065 13.487,17.907 v1(12.548,18.847) ; v1(12.903,21.946) 13.224,21.625 U8.5
  Bottom Layer w0.254: v1(12.548,18.847) 12.548,21.535 12.903,21.891 v1(12.903,21.946)
USB_N: C4.2 J2.A7 J2.B7 R18.2 | length 8.4
  Top Layer w0.178: v1(4.953,16.281) 4.958,16.286 6.171,16.286 J2.A7 6.237,16.352 6.724,16.352 6.761,16.389 7.29,16.389 7.78,16.878 8.843,16.878 8.947,16.774 8.947,16.593 R18.2 9.258,14.961 C4.2 ; v1(4.978,17.221) 5.013,17.256 6.14,17.256 J2.B7
  Bottom Layer w0.178: v1(4.953,16.281) 4.966,16.294 4.966,17.209 v1(4.978,17.221)
USB_P: C7.2 J2.A6 J2.B6 R19.2 | length 9.5
  Top Layer w0.178: J2.B6 4.529,15.791 4.227,16.093 4.227,16.419 4.538,16.73 6.114,16.73 J2.A6 6.237,16.73 6.724,16.73 6.761,16.693 7.164,16.693 7.654,17.183 8.843,17.183 8.947,17.287 8.947,17.469 R19.2 9.258,19.101 C7.2
VBUS: C21.2 J2.A4/B9 J2.A9/B4 R8.1 R20.1 | length 29.5
  Top Layer w0.254: C21.2 C21.2@11.811,30.035
  Top Layer w0.432: R8.1 3.467,12.957 ; J2.A9/B4 6.091,14.225 5.476,14.225 5.382,14.319 4.829,14.319 3.467,12.957 ; C21.2@11.633,29.858 9.588,29.858 9.068,29.337 9.068,27.889 7.088,25.91 7.088,19.299 6.814,19.025 6.259,19.025 J2.A4/B9 6.091,18.857 5.536,18.857 3.467,16.788 3.467,12.957 ; C21.2@11.811,30.035 R20.1
VCAP1: C18.2 U4.47 | length 5.1
  Top Layer w0.254: U4.47 46.54,9.964 46.54,9.442 46.864,9.119 49.06,9.119 49.6,8.579 50.349,8.579 C18.2
VCAP2: C19.2 U4.31 | length 1.7
  Top Layer w0.254: C19.2 36.646,12.332 36.778,12.464 37.523,12.464 U4.31
VCCIO: C10.2 U8.1 U8.8 U8.9 | length 12.7
  Top Layer w0.254: U8.8 U8.8@14.138,19.675 ; U8.9 14.963,18.85 U8.8@14.138,19.675 ; C10.2 20.516,25.624 18.33,25.624 17.38,24.673 17.38,23.955 16.913,23.488 U8.1 16.913,22.45 16.509,22.046 14.875,22.046 14.542,21.713 14.542,20.079 U8.8@14.138,19.675
pads on no net: J1.0 J1.7 J2.A8 J2.B8 J2.MH1 J2.MH2 SW2.4 SW2.5 SW2.6 U4.2 U4.3 U4.4 U4.8 U4.9 U4.10 U4.11 U4.14 U4.15 U4.16 U4.17 U4.20 U4.22 U4.24 U4.25 U4.26 U4.27 U4.28 U4.29 U4.30 U4.33 U4.34 U4.35 U4.36 U4.41 U4.44 U4.45 U4.54 U4.56 U4.57 U4.61 U4.62 U8.4 U8.12 U8.14 U8.16

## Polygon pours and split planes (outlines as drawn)
GND on Bottom Layer "GND_L02_P008" (solid, pour order 8): 0.969,32.908 1.096,32.908 58.014,32.908 58.014,0.726 0.791,0.726 0.791,32.705 0.791,32.908
GND on Top Layer "GND_L01_P007" (solid, pour order 7): 0.969,32.908 1.096,32.908 58.014,32.908 58.014,0.726 0.791,0.726 0.791,32.705 0.791,32.908

## Keep-outs
Keep-Out Layer:
  the board outline again, w0.254

## Other copper
Top Layer:
  pour cut-out: 5.104,18.972 cw(c5.104,19.405) 4.672,19.405 cw(c5.104,19.405) 5.104,19.837 cw(c5.104,19.405) 5.537,19.405 cw(c5.104,19.405)
  pour cut-out: 5.096,13.221 cw(c5.096,13.616) 4.701,13.616 cw(c5.096,13.616) 5.096,14.011 cw(c5.096,13.616) 5.491,13.616 cw(c5.096,13.616)
Bottom Layer:
  pour cut-out: 5.1,13.225 cw(c5.1,13.62) 4.706,13.62 cw(c5.1,13.62) 5.1,14.015 cw(c5.1,13.62) 5.495,13.62 cw(c5.1,13.62)
  pour cut-out: 5.1,18.997 cw(c5.09,19.416) 4.672,19.406 cw(c5.085,19.39) 5.1,19.803 cw(c5.1,19.373) 5.53,19.373 cw(c5.127,19.4)

## Silkscreen, mask and mechanical layers (free items; w line width, h text height)
Top Overlay:
  region: 692 vertices and 6 holes, not listed, extent 3.927,1.57 8.427,7.034
  text "TEMPERATURE/PRESSURE SENSOR" at 22.631,30.226 h1.27
  text "TEMP" at 21.819,22.327 h1.52
  text "PWM" at 32.487,13.03 h1.52 r90
  text "TX" at 11.836,12.268 h1.52
  text "RX" at 16.307,12.268 h1.52
  text "PRESS" at 21.412,11.659 h1.52
  text "PRESSURE/TEMPERATURE" at 27.737,6.045 h1.52
Bottom Overlay:
  drawing of 18 lines, arcs and shapes, not listed
Top Component Center:
  lines w0.05: 2.065,16.51 3.065,16.51 ; 2.565,16.01 2.565,17.01

## Text inside footprints (layer, text, board x,y; h text height)
U3: Top Overlay "*" at 33.295,22.809 h1.27 r270; Top 3D Body "*" at 33.295,20.955 h1.27 r270